# Altium PCB POT 10x8.PcbDoc (part 4 of 4)
Units mm, origin at the board's own origin, x right, y up, seen from the top; angles counter-clockwise.
Board outline 152.4 x 101.6 mm, 4 copper layers (Top Layer, Mid Layer 1, Mid Layer 2, Bottom Layer), stack 0.97 mm thick; 324 components, 355 nets, 1533 pads, 300 vias.
Unrouted connection lines stored in the file: 224.
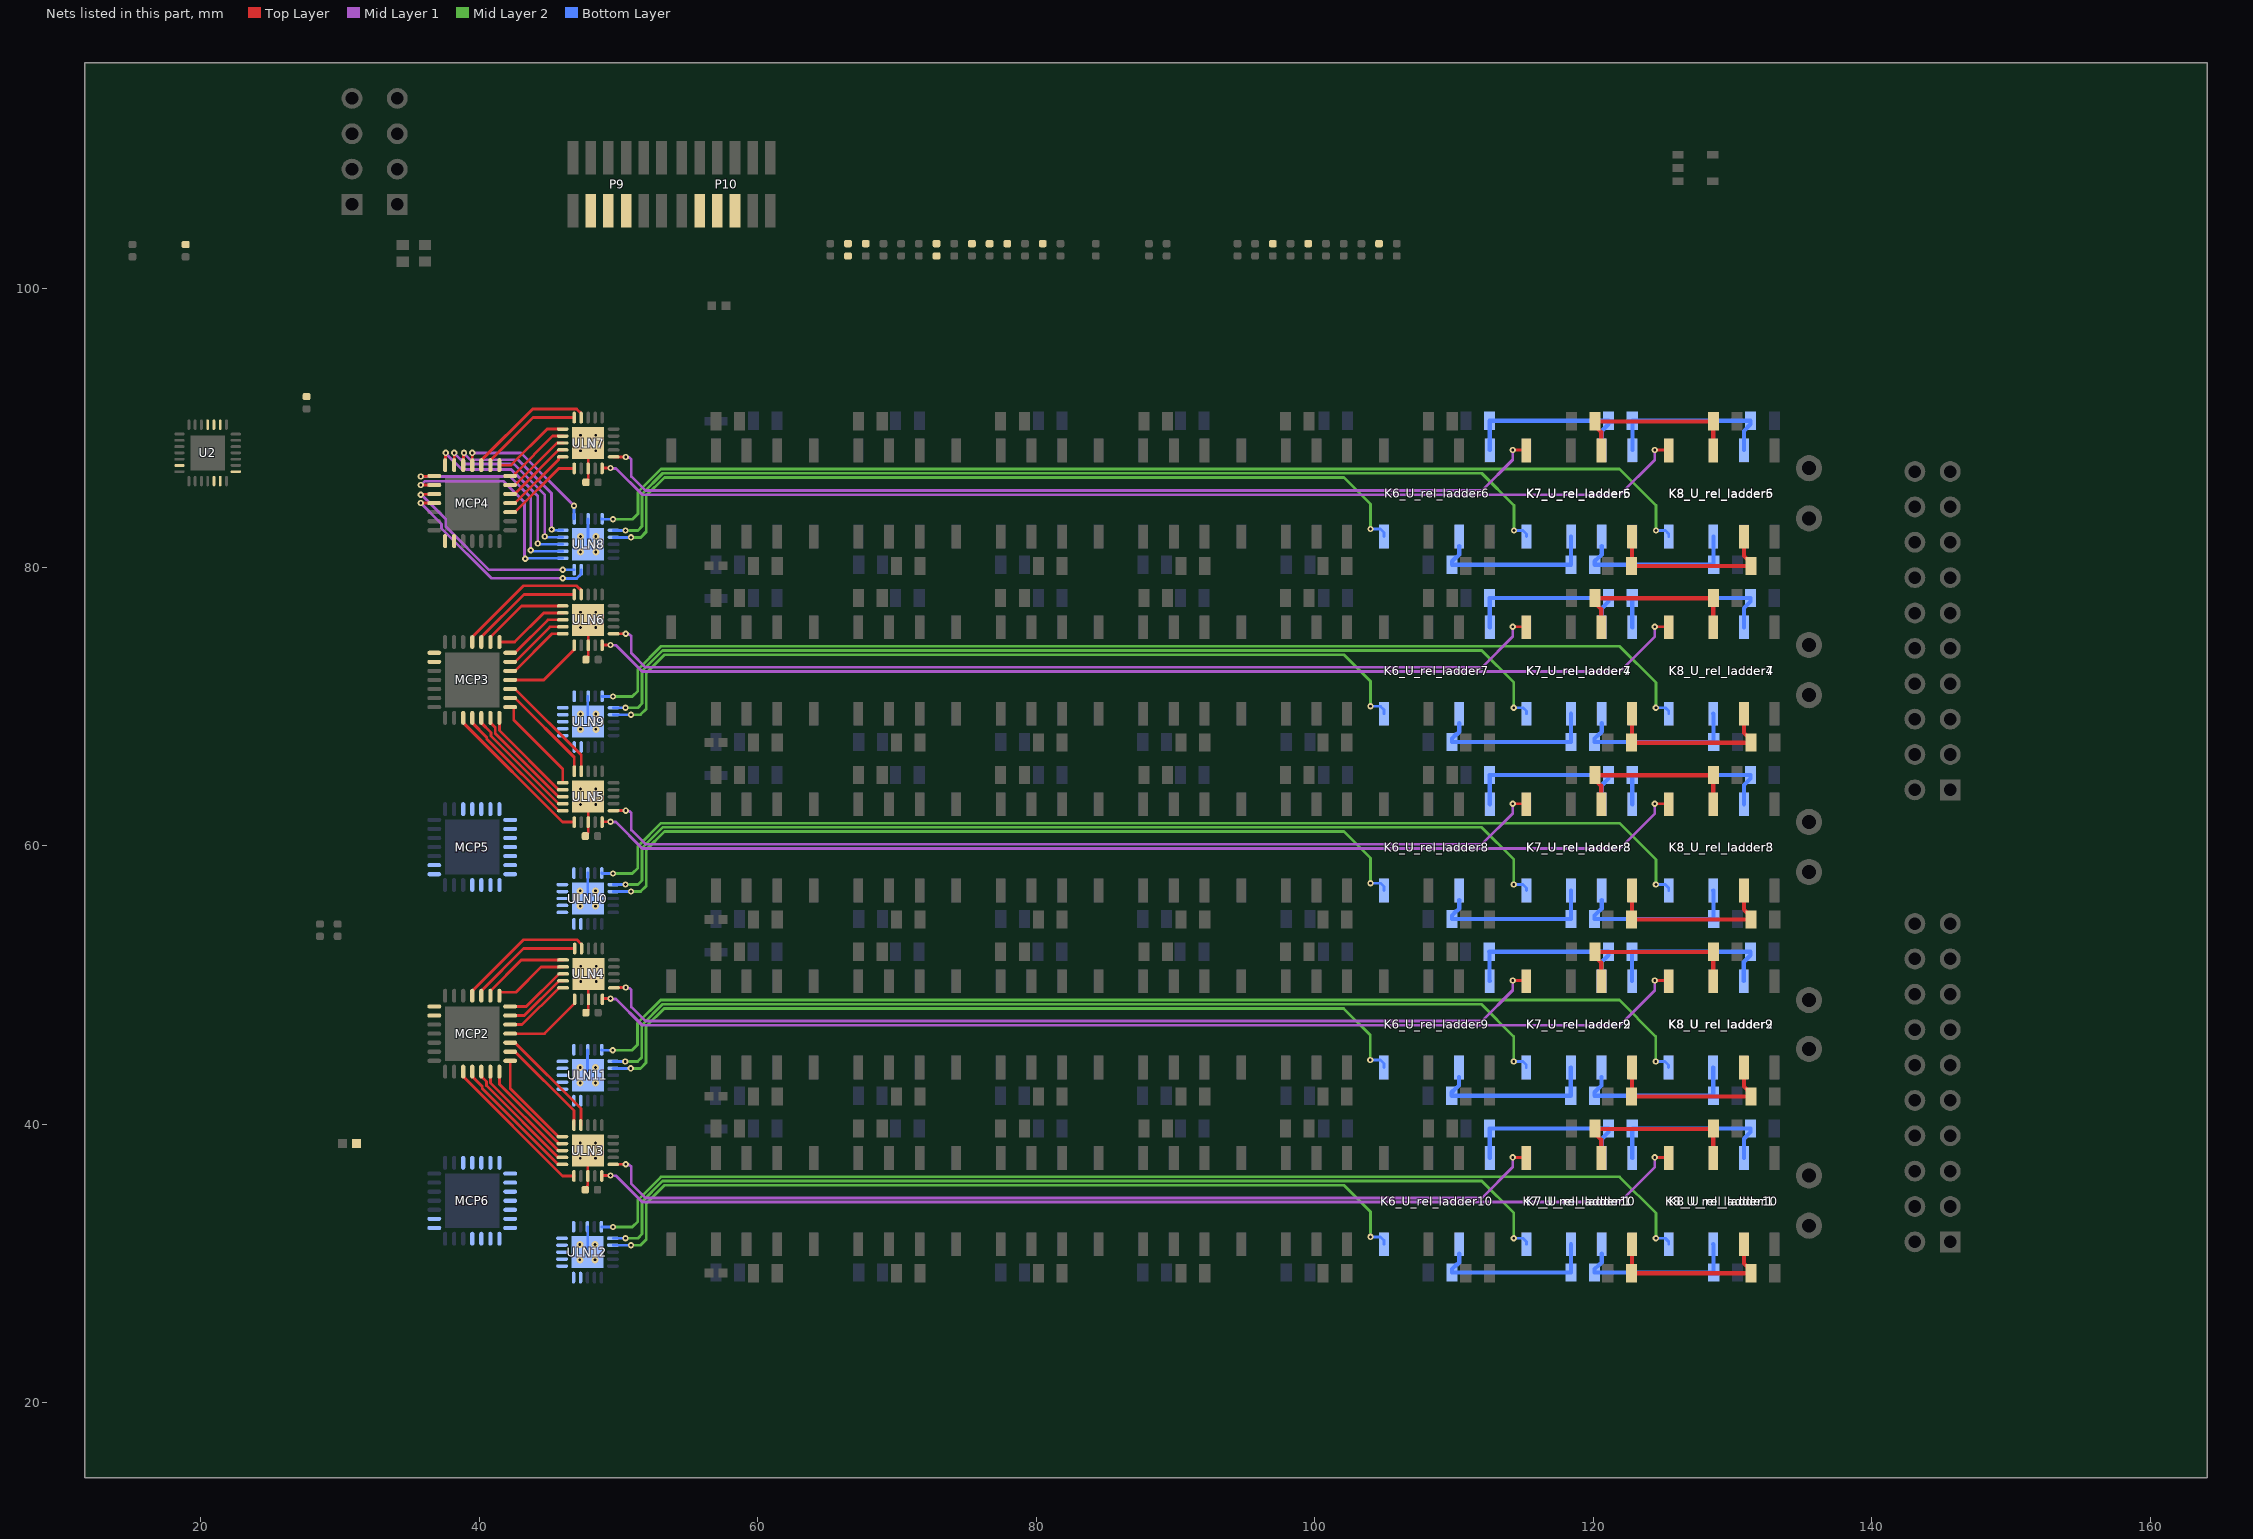
[diagram p6: the nets of this part, all layers, seen from the top]

## Via types
v1: diameter 0.45, hole 0.2, Top Layer to Bottom Layer, 186 vias
v2: diameter 0.5, hole 0.2, Top Layer to Bottom Layer, 85 vias
v3: diameter 0.6, hole 0.3, Top Layer to Bottom Layer, 25 vias
v4: diameter 0.66, hole 0.33, Top Layer to Bottom Layer, 4 vias

## Nets (pads, with @x,y where several pads share a name; then routed paths per layer and width w, separated by ;. In a path a pad name is that pad's centre, name@x,y a point inside that pad or via, vN(x,y) a via of type N, cw(c..) or ccw(c..) an arc to the next point about the centre after c; other vN are vias at no path point) (continued)
NetK6_U_rel_ladder6_4: K6_U_rel_ladder6.4 K7_U_rel_ladder6.3 R4_U_rel_ladder6.2 R6_U_rel_ladder6.1 | length 13
  Bottom Layer w0.3: K6_U_rel_ladder6.4@112.584,88.4 112.57,88.414 112.57,90.493 R6_U_rel_ladder6.1@112.556,90.507 R4_U_rel_ladder6.2@121.106,90.507 121.106,90.257 120.614,89.765 K7_U_rel_ladder6.3@120.614,88.4
NetK6_U_rel_ladder6_6: K6_U_rel_ladder6.6 K7_U_rel_ladder6.7 R3_U_rel_ladder6.2 R5_U_rel_ladder6.1 | length 12.2
  Bottom Layer w0.3: K6_U_rel_ladder6.6@110.384,81.521 110.384,80.9 110.208,80.724 110.164,80.724 109.856,80.416 R5_U_rel_ladder6.1@109.856,80.166 R3_U_rel_ladder6.2@118.406,80.166 118.41,80.17 118.41,82.196 K7_U_rel_ladder6.7@118.414,82.2
NetK6_U_rel_ladder6_8: K6_U_rel_ladder6.8 ULN8.12 | length 61.6
  Mid Layer 2 w0.2: v1(50.904,82.132) 51.598,82.132 51.998,82.532 51.998,85.132 53.304,86.438 102.098,86.438 104.004,84.532 v1(104.004,82.732)
  Bottom Layer w0.2: ULN8.12@49.629,82.132 v1(50.904,82.132) ; v1(104.004,82.732) 104.734,82.732 104.984,82.482 K6_U_rel_ladder6.8@104.984,82.2
NetK6_U_rel_ladder7_4: K6_U_rel_ladder7.4 K7_U_rel_ladder7.3 R4_U_rel_ladder7.2 R6_U_rel_ladder7.1 | length 13
  Bottom Layer w0.3: K6_U_rel_ladder7.4@112.58,75.668 112.566,75.682 112.566,77.761 R6_U_rel_ladder7.1@112.552,77.775 R4_U_rel_ladder7.2@121.102,77.775 121.102,77.525 120.61,77.033 K7_U_rel_ladder7.3@120.61,75.668
NetK6_U_rel_ladder7_6: K6_U_rel_ladder7.6 K7_U_rel_ladder7.7 R3_U_rel_ladder7.2 R5_U_rel_ladder7.1 | length 12.2
  Bottom Layer w0.3: K6_U_rel_ladder7.6@110.38,68.789 110.38,68.168 110.204,67.992 110.16,67.992 109.852,67.684 R5_U_rel_ladder7.1@109.852,67.434 R3_U_rel_ladder7.2@118.402,67.434 118.406,67.438 118.406,69.464 K7_U_rel_ladder7.7@118.41,69.468
NetK6_U_rel_ladder7_8: K6_U_rel_ladder7.8 ULN9.12 | length 61.6
  Mid Layer 2 w0.2: v1(50.9,69.4) 51.594,69.4 51.994,69.8 51.994,72.4 53.3,73.706 102.094,73.706 104,71.8 v1(104,70)
  Bottom Layer w0.2: ULN9.12@49.625,69.4 v1(50.9,69.4) ; v1(104,70) 104.73,70 104.98,69.75 K6_U_rel_ladder7.8@104.98,69.468
NetK6_U_rel_ladder8_4: K6_U_rel_ladder8.4 K7_U_rel_ladder8.3 R4_U_rel_ladder8.2 R6_U_rel_ladder8.1 | length 13
  Bottom Layer w0.3: K6_U_rel_ladder8.4@112.58,62.968 112.566,62.982 112.566,65.061 R6_U_rel_ladder8.1@112.552,65.075 R4_U_rel_ladder8.2@121.102,65.075 121.102,64.825 120.61,64.333 K7_U_rel_ladder8.3@120.61,62.968
NetK6_U_rel_ladder8_6: K6_U_rel_ladder8.6 K7_U_rel_ladder8.7 R3_U_rel_ladder8.2 R5_U_rel_ladder8.1 | length 12.2
  Bottom Layer w0.3: K6_U_rel_ladder8.6@110.38,56.089 110.38,55.468 110.204,55.292 110.16,55.292 109.852,54.984 R5_U_rel_ladder8.1@109.852,54.734 R3_U_rel_ladder8.2@118.402,54.734 118.406,54.738 118.406,56.764 K7_U_rel_ladder8.7@118.41,56.768
NetK6_U_rel_ladder8_8: K6_U_rel_ladder8.8 ULN10.12 | length 61.6
  Mid Layer 2 w0.2: v1(50.9,56.7) 51.594,56.7 51.994,57.1 51.994,59.7 53.3,61.006 102.094,61.006 104,59.1 v1(104,57.3)
  Bottom Layer w0.2: ULN10.12@49.625,56.7 v1(50.9,56.7) ; v1(104,57.3) 104.73,57.3 104.98,57.05 K6_U_rel_ladder8.8@104.98,56.768
NetK6_U_rel_ladder9_4: K6_U_rel_ladder9.4 K7_U_rel_ladder9.3 R4_U_rel_ladder9.2 R6_U_rel_ladder9.1 | length 13
  Bottom Layer w0.3: K6_U_rel_ladder9.4@112.566,50.268 112.552,50.282 112.552,52.361 R6_U_rel_ladder9.1@112.538,52.375 R4_U_rel_ladder9.2@121.088,52.375 121.088,52.125 120.596,51.633 K7_U_rel_ladder9.3@120.596,50.268
NetK6_U_rel_ladder9_6: K6_U_rel_ladder9.6 K7_U_rel_ladder9.7 R3_U_rel_ladder9.2 R5_U_rel_ladder9.1 | length 12.2
  Bottom Layer w0.3: K6_U_rel_ladder9.6@110.366,43.389 110.366,42.768 110.19,42.592 110.146,42.592 109.838,42.284 R5_U_rel_ladder9.1@109.838,42.034 R3_U_rel_ladder9.2@118.388,42.034 118.392,42.038 118.392,44.064 K7_U_rel_ladder9.7@118.396,44.068
NetK6_U_rel_ladder9_8: K6_U_rel_ladder9.8 ULN11.12 | length 61.6
  Mid Layer 2 w0.2: v1(50.886,44) 51.579,44 51.979,44.4 51.979,47 53.286,48.306 102.079,48.306 103.986,46.4 v1(103.986,44.6)
  Bottom Layer w0.2: ULN11.12@49.611,44 v1(50.886,44) ; v1(103.986,44.6) 104.716,44.6 104.966,44.35 K6_U_rel_ladder9.8@104.966,44.068
NetK6_U_rel_ladder10_4: K6_U_rel_ladder10.4 K7_U_rel_ladder10.3 R4_U_rel_ladder10.2 R6_U_rel_ladder10.1 | length 13
  Bottom Layer w0.3: K6_U_rel_ladder10.4@112.58,37.568 112.566,37.582 112.566,39.661 R6_U_rel_ladder10.1@112.552,39.675 R4_U_rel_ladder10.2@121.102,39.675 121.102,39.425 120.61,38.933 K7_U_rel_ladder10.3@120.61,37.568
NetK6_U_rel_ladder10_6: K6_U_rel_ladder10.6 K7_U_rel_ladder10.7 R3_U_rel_ladder10.2 R5_U_rel_ladder10.1 | length 12.2
  Bottom Layer w0.3: K6_U_rel_ladder10.6@110.38,30.689 110.38,30.068 110.204,29.892 110.16,29.892 109.852,29.584 R5_U_rel_ladder10.1@109.852,29.334 R3_U_rel_ladder10.2@118.402,29.334 118.406,29.338 118.406,31.364 K7_U_rel_ladder10.7@118.41,31.368
NetK6_U_rel_ladder10_8: K6_U_rel_ladder10.8 ULN12.12 | length 61.6
  Mid Layer 2 w0.2: v1(50.9,31.3) 51.594,31.3 51.994,31.7 51.994,34.3 53.3,35.606 102.094,35.606 104,33.7 v1(104,31.9)
  Bottom Layer w0.2: ULN12.12@49.625,31.3 v1(50.9,31.3) ; v1(104,31.9) 104.73,31.9 104.98,31.65 K6_U_rel_ladder10.8@104.98,31.368
NetK7_U_rel_ladder1_4: K7_U_rel_ladder1.4 K8_U_rel_ladder1.3 R2_U_rel_ladder1.2 R4_U_rel_ladder1.1 | length 12.9
  Top Layer w0.3: K7_U_rel_ladder1.4@122.791,31.368 122.786,31.363 122.786,29.293 122.781,29.288 131.28,29.288 131.28,29.538 130.824,29.994 K8_U_rel_ladder1.3@130.824,31.368
NetK7_U_rel_ladder1_6: K7_U_rel_ladder1.6 K8_U_rel_ladder1.7 R1_U_rel_ladder1.2 R3_U_rel_ladder1.1 | length 13
  Top Layer w0.3: K7_U_rel_ladder1.6@120.571,37.548 120.571,38.891 120.057,39.405 120.057,39.655 128.644,39.655 128.624,39.635 K8_U_rel_ladder1.7@128.624,37.568 K8_U_rel_ladder1.7@128.604,37.548
NetK7_U_rel_ladder1_8: K7_U_rel_ladder1.8 ULN3.11 | length 68.9
  Top Layer w0.2: ULN3.11@49.65,37.109 v1(50.525,37.109) ; v1(114.225,37.609) 115.184,37.609 K7_U_rel_ladder1.8@115.216,37.577
  Mid Layer 1 w0.2: v1(50.525,37.109) 50.573,37.061 50.796,37.061 50.925,36.932 50.925,35.709 51.933,34.701 112.017,34.701 114.225,36.909 v1(114.225,37.609)
NetK7_U_rel_ladder2_4: K7_U_rel_ladder2.4 K8_U_rel_ladder2.3 R2_U_rel_ladder2.2 R4_U_rel_ladder2.1 | length 12.9
  Top Layer w0.3: K7_U_rel_ladder2.4@122.791,44.068 122.786,44.063 122.786,41.993 122.781,41.988 131.28,41.988 131.28,42.238 130.824,42.694 K8_U_rel_ladder2.3@130.824,44.068
NetK7_U_rel_ladder2_6: K7_U_rel_ladder2.6 K8_U_rel_ladder2.7 R1_U_rel_ladder2.2 R3_U_rel_ladder2.1 | length 13
  Top Layer w0.3: K7_U_rel_ladder2.6@120.571,50.248 120.571,51.591 120.057,52.105 120.057,52.355 128.644,52.355 128.624,52.335 K8_U_rel_ladder2.7@128.624,50.268 K8_U_rel_ladder2.7@128.604,50.248
NetK7_U_rel_ladder2_8: K7_U_rel_ladder2.8 ULN4.11 | length 68.9
  Top Layer w0.2: ULN4.11@49.65,49.809 v1(50.525,49.809) ; v1(114.225,50.309) 115.184,50.309 K7_U_rel_ladder2.8@115.216,50.277
  Mid Layer 1 w0.2: v1(50.525,49.809) 50.573,49.761 50.796,49.761 50.925,49.632 50.925,48.409 51.933,47.401 112.017,47.401 114.225,49.609 v1(114.225,50.309)
NetK7_U_rel_ladder3_4: K7_U_rel_ladder3.4 K8_U_rel_ladder3.3 R2_U_rel_ladder3.2 R4_U_rel_ladder3.1 | length 12.9
  Top Layer w0.3: K7_U_rel_ladder3.4@122.791,56.768 122.786,56.763 122.786,54.693 122.781,54.688 131.28,54.688 131.28,54.938 130.824,55.394 K8_U_rel_ladder3.3@130.824,56.768
NetK7_U_rel_ladder3_6: K7_U_rel_ladder3.6 K8_U_rel_ladder3.7 R1_U_rel_ladder3.2 R3_U_rel_ladder3.1 | length 13
  Top Layer w0.3: K7_U_rel_ladder3.6@120.571,62.948 120.571,64.291 120.057,64.805 120.057,65.055 128.644,65.055 128.624,65.035 K8_U_rel_ladder3.7@128.624,62.968 K8_U_rel_ladder3.7@128.604,62.948
NetK7_U_rel_ladder3_8: K7_U_rel_ladder3.8 ULN5.11 | length 68.9
  Top Layer w0.2: ULN5.11@49.65,62.509 v1(50.525,62.509) ; v1(114.225,63.009) 115.184,63.009 K7_U_rel_ladder3.8@115.216,62.977
  Mid Layer 1 w0.2: v1(50.525,62.509) 50.573,62.461 50.796,62.461 50.925,62.332 50.925,61.109 51.933,60.101 112.017,60.101 114.225,62.309 v1(114.225,63.009)
NetK7_U_rel_ladder4_4: K7_U_rel_ladder4.4 K8_U_rel_ladder4.3 R2_U_rel_ladder4.2 R4_U_rel_ladder4.1 | length 12.9
  Top Layer w0.3: K7_U_rel_ladder4.4@122.791,69.468 122.786,69.463 122.786,67.393 122.781,67.388 131.28,67.388 131.28,67.638 130.824,68.094 K8_U_rel_ladder4.3@130.824,69.468
NetK7_U_rel_ladder4_6: K7_U_rel_ladder4.6 K8_U_rel_ladder4.7 R1_U_rel_ladder4.2 R3_U_rel_ladder4.1 | length 13
  Top Layer w0.3: K7_U_rel_ladder4.6@120.571,75.648 120.571,76.991 120.057,77.505 120.057,77.755 128.644,77.755 128.624,77.735 K8_U_rel_ladder4.7@128.624,75.668 K8_U_rel_ladder4.7@128.604,75.648
NetK7_U_rel_ladder4_8: K7_U_rel_ladder4.8 ULN6.11 | length 68.9
  Top Layer w0.2: ULN6.11@49.65,75.209 v1(50.525,75.209) ; v1(114.225,75.709) 115.184,75.709 K7_U_rel_ladder4.8@115.216,75.677
  Mid Layer 1 w0.2: v1(50.525,75.209) 50.573,75.161 50.796,75.161 50.925,75.032 50.925,73.809 51.933,72.801 112.017,72.801 114.225,75.009 v1(114.225,75.709)
NetK7_U_rel_ladder5_4: K7_U_rel_ladder5.4 K8_U_rel_ladder5.3 R2_U_rel_ladder5.2 R4_U_rel_ladder5.1 | length 12.9
  Top Layer w0.3: K7_U_rel_ladder5.4@122.791,82.168 122.786,82.163 122.786,80.093 122.781,80.088 131.28,80.088 131.28,80.338 130.824,80.794 K8_U_rel_ladder5.3@130.824,82.168
NetK7_U_rel_ladder5_6: K7_U_rel_ladder5.6 K8_U_rel_ladder5.7 R1_U_rel_ladder5.2 R3_U_rel_ladder5.1 | length 13
  Top Layer w0.3: K7_U_rel_ladder5.6@120.571,88.348 120.571,89.691 120.057,90.205 120.057,90.455 128.644,90.455 128.624,90.435 K8_U_rel_ladder5.7@128.624,88.368 K8_U_rel_ladder5.7@128.604,88.348
NetK7_U_rel_ladder5_8: K7_U_rel_ladder5.8 ULN7.11 | length 68.9
  Top Layer w0.2: ULN7.11@49.65,87.909 v1(50.525,87.909) ; v1(114.225,88.409) 115.184,88.409 K7_U_rel_ladder5.8@115.216,88.377
  Mid Layer 1 w0.2: v1(50.525,87.909) 50.573,87.861 50.796,87.861 50.925,87.732 50.925,86.509 51.933,85.501 112.017,85.501 114.225,87.709 v1(114.225,88.409)
NetK7_U_rel_ladder6_4: K7_U_rel_ladder6.4 K8_U_rel_ladder6.3 R2_U_rel_ladder6.2 R4_U_rel_ladder6.1 | length 12.9
  Bottom Layer w0.3: K7_U_rel_ladder6.4@122.814,88.4 122.81,88.404 122.81,90.503 R4_U_rel_ladder6.1@122.806,90.507 R2_U_rel_ladder6.2@131.306,90.507 131.306,90.257 130.828,89.779 K8_U_rel_ladder6.3@130.828,88.4
NetK7_U_rel_ladder6_6: K7_U_rel_ladder6.6 K8_U_rel_ladder6.7 R1_U_rel_ladder6.2 R3_U_rel_ladder6.1 | length 12.2
  Bottom Layer w0.3: K7_U_rel_ladder6.6@120.614,81.521 120.614,80.9 120.439,80.724 120.414,80.724 120.106,80.416 R3_U_rel_ladder6.1@120.106,80.166 128.642,80.166 R1_U_rel_ladder6.2@128.642,80.18 ; K8_U_rel_ladder6.7@128.628,82.2 128.642,82.186 R1_U_rel_ladder6.2@128.642,80.18 ; R1_U_rel_ladder6.2@128.656,80.166 R1_U_rel_ladder6.2@128.642,80.18
NetK7_U_rel_ladder6_8: K7_U_rel_ladder6.8 ULN8.11 | length 71.7
  Mid Layer 2 w0.2: v1(50.504,82.632) 51.396,82.632 51.696,82.932 51.696,85.257 53.179,86.74 111.996,86.74 114.304,84.432 v1(114.304,82.632)
  Bottom Layer w0.2: ULN8.11@49.629,82.632 v1(50.504,82.632) ; v1(114.304,82.632) 114.964,82.632 115.214,82.382 K7_U_rel_ladder6.8@115.214,82.2
NetK7_U_rel_ladder7_4: K7_U_rel_ladder7.4 K8_U_rel_ladder7.3 R2_U_rel_ladder7.2 R4_U_rel_ladder7.1 | length 12.9
  Bottom Layer w0.3: K7_U_rel_ladder7.4@122.81,75.668 122.806,75.672 122.806,77.771 R4_U_rel_ladder7.1@122.802,77.775 R2_U_rel_ladder7.2@131.302,77.775 131.302,77.525 130.824,77.047 K8_U_rel_ladder7.3@130.824,75.668
NetK7_U_rel_ladder7_6: K7_U_rel_ladder7.6 K8_U_rel_ladder7.7 R1_U_rel_ladder7.2 R3_U_rel_ladder7.1 | length 12.2
  Bottom Layer w0.3: K7_U_rel_ladder7.6@120.61,68.789 120.61,68.168 120.435,67.992 120.41,67.992 120.102,67.684 R3_U_rel_ladder7.1@120.102,67.434 128.638,67.434 R1_U_rel_ladder7.2@128.638,67.448 ; K8_U_rel_ladder7.7@128.624,69.468 128.638,69.454 R1_U_rel_ladder7.2@128.638,67.448 ; R1_U_rel_ladder7.2@128.652,67.434 R1_U_rel_ladder7.2@128.638,67.448
NetK7_U_rel_ladder7_8: K7_U_rel_ladder7.8 ULN9.11 | length 71.7
  Mid Layer 2 w0.2: v1(50.5,69.9) 51.392,69.9 51.692,70.2 51.692,72.525 53.175,74.008 111.992,74.008 114.3,71.7 v1(114.3,69.9)
  Bottom Layer w0.2: ULN9.11@49.625,69.9 v1(50.5,69.9) ; v1(114.3,69.9) 114.96,69.9 115.21,69.65 K7_U_rel_ladder7.8@115.21,69.468
NetK7_U_rel_ladder8_4: K7_U_rel_ladder8.4 K8_U_rel_ladder8.3 R2_U_rel_ladder8.2 R4_U_rel_ladder8.1 | length 12.9
  Bottom Layer w0.3: K7_U_rel_ladder8.4@122.81,62.968 122.806,62.972 122.806,65.071 R4_U_rel_ladder8.1@122.802,65.075 R2_U_rel_ladder8.2@131.302,65.075 131.302,64.825 130.824,64.347 K8_U_rel_ladder8.3@130.824,62.968
NetK7_U_rel_ladder8_6: K7_U_rel_ladder8.6 K8_U_rel_ladder8.7 R1_U_rel_ladder8.2 R3_U_rel_ladder8.1 | length 12.2
  Bottom Layer w0.3: K7_U_rel_ladder8.6@120.61,56.089 120.61,55.468 120.435,55.292 120.41,55.292 120.102,54.984 R3_U_rel_ladder8.1@120.102,54.734 128.638,54.734 R1_U_rel_ladder8.2@128.638,54.748 ; K8_U_rel_ladder8.7@128.624,56.768 128.638,56.754 R1_U_rel_ladder8.2@128.638,54.748 ; R1_U_rel_ladder8.2@128.652,54.734 R1_U_rel_ladder8.2@128.638,54.748
NetK7_U_rel_ladder8_8: K7_U_rel_ladder8.8 ULN10.11 | length 71.7
  Mid Layer 2 w0.2: v1(50.5,57.2) 51.392,57.2 51.692,57.5 51.692,59.825 53.175,61.308 111.992,61.308 114.3,59 v1(114.3,57.2)
  Bottom Layer w0.2: ULN10.11@49.625,57.2 v1(50.5,57.2) ; v1(114.3,57.2) 114.96,57.2 115.21,56.95 K7_U_rel_ladder8.8@115.21,56.768
NetK7_U_rel_ladder9_4: K7_U_rel_ladder9.4 K8_U_rel_ladder9.3 R2_U_rel_ladder9.2 R4_U_rel_ladder9.1 | length 12.9
  Bottom Layer w0.3: K7_U_rel_ladder9.4@122.796,50.268 122.792,50.272 122.792,52.371 R4_U_rel_ladder9.1@122.788,52.375 R2_U_rel_ladder9.2@131.288,52.375 131.288,52.125 130.81,51.647 K8_U_rel_ladder9.3@130.81,50.268
NetK7_U_rel_ladder9_6: K7_U_rel_ladder9.6 K8_U_rel_ladder9.7 R1_U_rel_ladder9.2 R3_U_rel_ladder9.1 | length 12.2
  Bottom Layer w0.3: K7_U_rel_ladder9.6@120.596,43.389 120.596,42.768 120.42,42.592 120.396,42.592 120.088,42.284 R3_U_rel_ladder9.1@120.088,42.034 128.624,42.034 R1_U_rel_ladder9.2@128.624,42.048 ; K8_U_rel_ladder9.7@128.61,44.068 128.624,44.054 R1_U_rel_ladder9.2@128.624,42.048 ; R1_U_rel_ladder9.2@128.638,42.034 R1_U_rel_ladder9.2@128.624,42.048
NetK7_U_rel_ladder9_8: K7_U_rel_ladder9.8 ULN11.11 | length 71.7
  Mid Layer 2 w0.2: v1(50.486,44.5) 51.378,44.5 51.678,44.8 51.678,47.125 53.161,48.608 111.978,48.608 114.286,46.3 v1(114.286,44.5)
  Bottom Layer w0.2: ULN11.11@49.611,44.5 v1(50.486,44.5) ; v1(114.286,44.5) 114.946,44.5 115.196,44.25 K7_U_rel_ladder9.8@115.196,44.068
NetK7_U_rel_ladder10_4: K7_U_rel_ladder10.4 K8_U_rel_ladder10.3 R2_U_rel_ladder10.2 R4_U_rel_ladder10.1 | length 12.9
  Bottom Layer w0.3: K7_U_rel_ladder10.4@122.81,37.568 122.806,37.572 122.806,39.671 R4_U_rel_ladder10.1@122.802,39.675 R2_U_rel_ladder10.2@131.302,39.675 131.302,39.425 130.824,38.947 K8_U_rel_ladder10.3@130.824,37.568
NetK7_U_rel_ladder10_6: K7_U_rel_ladder10.6 K8_U_rel_ladder10.7 R1_U_rel_ladder10.2 R3_U_rel_ladder10.1 | length 12.2
  Bottom Layer w0.3: K7_U_rel_ladder10.6@120.61,30.689 120.61,30.068 120.435,29.892 120.41,29.892 120.102,29.584 R3_U_rel_ladder10.1@120.102,29.334 128.638,29.334 R1_U_rel_ladder10.2@128.638,29.348 ; K8_U_rel_ladder10.7@128.624,31.368 128.638,31.354 R1_U_rel_ladder10.2@128.638,29.348 ; R1_U_rel_ladder10.2@128.652,29.334 R1_U_rel_ladder10.2@128.638,29.348
NetK7_U_rel_ladder10_8: K7_U_rel_ladder10.8 ULN12.11 | length 71.7
  Mid Layer 2 w0.2: v1(50.5,31.8) 51.392,31.8 51.692,32.1 51.692,34.425 53.175,35.908 111.992,35.908 114.3,33.6 v1(114.3,31.8)
  Bottom Layer w0.2: ULN12.11@49.625,31.8 v1(50.5,31.8) ; v1(114.3,31.8) 114.96,31.8 115.21,31.55 K7_U_rel_ladder10.8@115.21,31.368
NetK8_U_rel_ladder1_8: K8_U_rel_ladder1.8 ULN3.10 | length 79.2
  Top Layer w0.2: ULN3.10@48.825,36.284 48.825,36.286 48.848,36.309 v1(49.425,36.309) ; v1(124.425,37.609) 125.417,37.609 K8_U_rel_ladder1.8@125.449,37.577
  Mid Layer 1 w0.2: v1(49.425,36.309) 49.446,36.288 49.824,36.288 51.712,34.399 121.915,34.399 124.425,36.909 v1(124.425,37.609)
NetK8_U_rel_ladder2_8: K8_U_rel_ladder2.8 ULN4.10 | length 79.2
  Top Layer w0.2: ULN4.10@48.825,48.984 48.825,48.986 48.848,49.009 v1(49.425,49.009) ; v1(124.425,50.309) 125.417,50.309 K8_U_rel_ladder2.8@125.449,50.277
  Mid Layer 1 w0.2: v1(49.425,49.009) 49.446,48.988 49.824,48.988 51.712,47.099 121.915,47.099 124.425,49.609 v1(124.425,50.309)
NetK8_U_rel_ladder3_8: K8_U_rel_ladder3.8 ULN5.10 | length 79.2
  Top Layer w0.2: ULN5.10@48.825,61.684 48.825,61.686 48.848,61.709 v1(49.425,61.709) ; v1(124.425,63.009) 125.417,63.009 K8_U_rel_ladder3.8@125.449,62.977
  Mid Layer 1 w0.2: v1(49.425,61.709) 49.446,61.688 49.824,61.688 51.712,59.799 121.915,59.799 124.425,62.309 v1(124.425,63.009)
NetK8_U_rel_ladder4_8: K8_U_rel_ladder4.8 ULN6.10 | length 79.2
  Top Layer w0.2: ULN6.10@48.825,74.384 48.825,74.386 48.848,74.409 v1(49.425,74.409) ; v1(124.425,75.709) 125.417,75.709 K8_U_rel_ladder4.8@125.449,75.677
  Mid Layer 1 w0.2: v1(49.425,74.409) 49.446,74.388 49.824,74.388 51.712,72.499 121.915,72.499 124.425,75.009 v1(124.425,75.709)
NetK8_U_rel_ladder5_8: K8_U_rel_ladder5.8 ULN7.10 | length 79.2
  Top Layer w0.2: ULN7.10@48.825,87.084 48.825,87.086 48.848,87.109 v1(49.425,87.109) ; v1(124.425,88.409) 125.417,88.409 K8_U_rel_ladder5.8@125.449,88.377
  Mid Layer 1 w0.2: v1(49.425,87.109) 49.446,87.088 49.824,87.088 51.712,85.199 121.915,85.199 124.425,87.709 v1(124.425,88.409)
NetK8_U_rel_ladder6_8: K8_U_rel_ladder6.8 ULN8.10 | length 82.2
  Mid Layer 2 w0.2: v1(49.604,83.432) 50.994,83.432 51.394,83.832 51.394,85.382 53.054,87.042 111.704,87.042 121.894,87.042 124.504,84.432 v1(124.504,82.632)
  Bottom Layer w0.2: ULN8.10@48.804,83.457 48.804,83.455 48.827,83.432 v1(49.604,83.432) ; v1(124.504,82.632) 125.178,82.632 125.428,82.382 K8_U_rel_ladder6.8@125.428,82.2
NetK8_U_rel_ladder7_8: K8_U_rel_ladder7.8 ULN9.10 | length 82.2
  Mid Layer 2 w0.2: v1(49.6,70.7) 50.99,70.7 51.39,71.1 51.39,72.65 53.05,74.31 111.7,74.31 121.89,74.31 124.5,71.7 v1(124.5,69.9)
  Bottom Layer w0.2: ULN9.10@48.8,70.725 48.8,70.723 48.823,70.7 v1(49.6,70.7) ; v1(124.5,69.9) 125.174,69.9 125.424,69.65 K8_U_rel_ladder7.8@125.424,69.468
NetK8_U_rel_ladder8_8: K8_U_rel_ladder8.8 ULN10.10 | length 82.2
  Mid Layer 2 w0.2: v1(49.6,58) 50.99,58 51.39,58.4 51.39,59.95 53.05,61.61 111.7,61.61 121.89,61.61 124.5,59 v1(124.5,57.2)
  Bottom Layer w0.2: ULN10.10@48.8,58.023 ULN10.10@48.8,58.023 48.823,58 v1(49.6,58) ; v1(124.5,57.2) 125.174,57.2 125.424,56.95 K8_U_rel_ladder8.8@125.424,56.768
NetK8_U_rel_ladder9_8: K8_U_rel_ladder9.8 ULN11.10 | length 82.2
  Mid Layer 2 w0.2: v1(49.586,45.3) 50.976,45.3 51.376,45.7 51.376,47.25 53.036,48.91 111.686,48.91 121.876,48.91 124.486,46.3 v1(124.486,44.5)
  Bottom Layer w0.2: ULN11.10@48.786,45.325 48.786,45.323 48.809,45.3 v1(49.586,45.3) ; v1(124.486,44.5) 125.16,44.5 125.41,44.25 K8_U_rel_ladder9.8@125.41,44.068
NetK8_U_rel_ladder10_8: K8_U_rel_ladder10.8 ULN12.10 | length 82.2
  Mid Layer 2 w0.2: v1(49.6,32.6) 50.99,32.6 51.39,33 51.39,34.55 53.05,36.21 111.7,36.21 121.89,36.21 124.5,33.6 v1(124.5,31.8)
  Bottom Layer w0.2: ULN12.10@48.8,32.625 48.8,32.623 48.823,32.6 v1(49.6,32.6) ; v1(124.5,31.8) 125.174,31.8 125.424,31.55 K8_U_rel_ladder10.8@125.424,31.368
NetMCP2_1: MCP2.1 ULN4.2 | length 5.5
  Top Layer w0.2: MCP2.1@41.45,49.218 41.45,49.422 41.496,49.468 42.631,49.468 44.447,51.284 ULN4.2@46.023,51.284
NetMCP2_2: MCP2.2 ULN4.1 | length 6.5
  Top Layer w0.2: MCP2.2@40.8,49.218 40.8,49.568 43.016,51.784 ULN4.1@46.023,51.784
NetMCP2_3: MCP2.3 ULN4.20 | length 8.3
  Top Layer w0.2: MCP2.3@40.15,49.218 40.15,49.568 43.191,52.609 ULN4.20@46.848,52.609
NetMCP2_4: MCP2.4 ULN4.19 | length 10.2
  Top Layer w0.2: MCP2.4@39.5,49.218 39.5,49.568 43.168,53.236 47.022,53.236 47.348,52.909 ULN4.19@47.348,52.609
NetMCP2_17: MCP2.17 ULN3.6 | length 11.3
  Top Layer w0.2: MCP2.17@38.85,43.768 38.85,43.418 45.993,36.275 ULN3.6@46.8,36.275
NetMCP2_18: MCP2.18 ULN3.5 | length 9.5
  Top Layer w0.2: MCP2.18@39.5,43.768 39.5,43.418 40.216,42.702 40.216,42.559 45.675,37.1 ULN3.5@45.975,37.1
NetMCP2_19: MCP2.19 ULN3.4 | length 8.8
  Top Layer w0.2: MCP2.19@40.15,43.768 40.15,43.418 40.518,43.05 40.518,42.757 45.675,37.6 ULN3.4@45.975,37.6
NetMCP2_20: MCP2.20 ULN3.3 | length 8
  Top Layer w0.2: MCP2.20@40.8,43.768 40.819,43.749 40.819,42.956 45.675,38.1 ULN3.3@45.975,38.1
NetMCP2_21: MCP2.21 ULN3.2 | length 7.3
  Top Layer w0.2: MCP2.21@41.45,43.768 41.45,42.863 45.761,38.552 45.761,38.577 45.784,38.6 ULN3.2@45.975,38.6
NetMCP2_22: MCP2.22 ULN3.1 | length 7.2
  Top Layer w0.2: MCP2.22@42.225,44.543 42.225,42.55 45.675,39.1 ULN3.1@45.975,39.1
NetMCP2_23: MCP2.23 ULN3.20 | length 7.4
  Top Layer w0.2: MCP2.23@42.225,45.193 42.575,45.193 46.8,40.968 ULN3.20@46.8,39.925
NetMCP2_24: MCP2.24 ULN3.19 | length 8.2
  Top Layer w0.2: MCP2.24@42.225,45.843 42.575,45.843 47.3,41.118 ULN3.19@47.3,39.925
NetMCP2_25: MCP2.25 ULN4.6 | length 5.8
  Top Layer w0.2: MCP2.25@42.225,46.493 44.682,46.493 46.848,48.659 ULN4.6@46.848,48.959
NetMCP2_26: MCP2.26 ULN4.5 | length 4.9
  Top Layer w0.2: MCP2.26@42.225,47.143 43.082,47.143 45.723,49.784 ULN4.5@46.023,49.784
NetMCP2_27: MCP2.27 ULN4.4 | length 4.8
  Top Layer w0.2: MCP2.27@42.225,47.793 43.232,47.793 45.723,50.284 ULN4.4@46.023,50.284
NetMCP2_28: MCP2.28 ULN4.3 | length 4.8
  Top Layer w0.2: MCP2.28@42.225,48.443 43.382,48.443 45.723,50.784 ULN4.3@46.023,50.784
NetMCP3_1: MCP3.1 ULN6.2 | length 5.4
  Top Layer w0.2: MCP3.1@41.45,74.618 42.546,74.618 44.637,76.709 ULN6.2@46,76.709
NetMCP3_2: MCP3.2 ULN6.1 | length 6.5
  Top Layer w0.2: MCP3.2@40.8,74.618 40.8,74.968 43.041,77.209 ULN6.1@46,77.209
NetMCP3_3: MCP3.3 ULN6.20 | length 8.3
  Top Layer w0.2: MCP3.3@40.15,74.618 40.15,74.968 43.216,78.034 ULN6.20@46.825,78.034
NetMCP3_4: MCP3.4 ULN6.19 | length 10.1
  Top Layer w0.2: MCP3.4@39.5,74.618 39.5,74.968 43.193,78.661 46.998,78.661 47.325,78.334 ULN6.19@47.325,78.034
NetMCP3_17: MCP3.17 ULN5.6 | length 11.3
  Top Layer w0.2: MCP3.17@38.85,69.168 38.85,68.818 45.984,61.684 ULN5.6@46.825,61.684
NetMCP3_18: MCP3.18 ULN5.5 | length 9.5
  Top Layer w0.2: MCP3.18@39.5,69.168 39.5,68.818 40.545,67.773 40.545,67.664 45.7,62.509 ULN5.5@46,62.509
NetMCP3_19: MCP3.19 ULN5.4 | length 8.8
  Top Layer w0.2: MCP3.19@40.15,69.168 40.15,68.818 40.847,68.121 40.847,67.862 45.7,63.009 ULN5.4@46,63.009
NetMCP3_20: MCP3.20 ULN5.3 | length 8
  Top Layer w0.2: MCP3.20@40.8,69.168 40.8,68.818 41.148,68.47 41.148,68.061 45.7,63.509 ULN5.3@46,63.509
NetMCP3_21: MCP3.21 ULN5.2 | length 7.2
  Top Layer w0.2: MCP3.21@41.45,69.168 41.45,68.259 45.7,64.009 ULN5.2@46,64.009
NetMCP3_22: MCP3.22 ULN5.1 | length 7.1
  Top Layer w0.2: MCP3.22@42.225,69.943 42.429,69.943 42.475,69.897 42.475,69.037 46,65.511 ULN5.1@46,64.509
NetMCP3_23: MCP3.23 ULN5.20 | length 7.4
  Top Layer w0.2: MCP3.23@42.225,70.593 42.575,70.593 46.825,66.343 ULN5.20@46.825,65.334
NetMCP3_24: MCP3.24 ULN5.19 | length 8.2
  Top Layer w0.2: MCP3.24@42.225,71.243 42.575,71.243 47.325,66.493 ULN5.19@47.325,65.334
NetMCP3_25: MCP3.25 ULN6.6 | length 5.8
  Top Layer w0.2: MCP3.25@42.225,71.893 44.634,71.893 46.825,74.084 ULN6.6@46.825,74.384
NetMCP3_26: MCP3.26 ULN6.5 | length 4.9
  Top Layer w0.2: MCP3.26@42.225,72.543 42.575,72.543 45.241,75.209 ULN6.5@46,75.209
NetMCP3_27: MCP3.27 ULN6.4 | length 4.8
  Top Layer w0.2: MCP3.27@42.225,73.193 42.575,73.193 45.091,75.709 ULN6.4@46,75.709
NetMCP3_28: MCP3.28 ULN6.3 | length 4.8
  Top Layer w0.2: MCP3.28@42.225,73.843 42.575,73.843 44.941,76.209 ULN6.3@46,76.209
NetMCP4_1: MCP4.1 ULN8.2 | length 15.6
  Top Layer w0.2: v1(35.8,86.5) 35.824,86.524 36.756,86.524 MCP4.1@36.775,86.543
  Mid Layer 1 w0.2: v1(35.8,86.5) 42.2,86.5 43.7,85 v1(43.7,81.2)
  Bottom Layer w0.2: v1(43.7,81.2) 43.768,81.2 43.83,81.138 ULN8.2@46,81.138
NetMCP4_2: MCP4.2 ULN8.1 | length 16
  Top Layer w0.2: v1(35.8,85.9) 35.803,85.897 36.771,85.897 MCP4.2@36.775,85.893
  Mid Layer 1 w0.2: v1(35.8,85.9) 35.842,85.9 36.112,86.17 41.73,86.17 43.248,84.652 43.248,81.013 43.252,81.009 43.252,80.648 v1(43.3,80.6)
  Bottom Layer w0.2: v1(43.3,80.6) 43.328,80.628 45.991,80.628 ULN8.1@46,80.638
NetMCP4_3: MCP4.3 ULN8.20 | length 14.6
  Top Layer w0.2: v1(35.8,85.2) 35.824,85.224 36.756,85.224 MCP4.3@36.775,85.243
  Mid Layer 1 w0.2: v1(35.8,85.2) 35.839,85.2 37.6,83.439 37.6,82.9 40.7,79.8 v1(46,79.8)
  Bottom Layer w0.2: v1(46,79.8) 46.812,79.8 ULN8.20@46.825,79.813
NetMCP4_4: MCP4.4 ULN8.19 | length 15.4
  Top Layer w0.2: v1(35.8,84.6) 35.803,84.597 36.771,84.597 MCP4.4@36.775,84.593
  Mid Layer 1 w0.2: v1(35.8,84.6) 37.298,83.102 37.298,82.775 40.873,79.2 v1(46,79.2)
  Bottom Layer w0.2: v1(46,79.2) 46.014,79.186 46.998,79.186 47.325,79.513 ULN8.19@47.325,79.813
NetMCP4_17: MCP4.17 ULN7.6 | length 5.9
  Top Layer w0.2: MCP4.17@42.225,83.943 42.575,83.943 45.716,87.084 ULN7.6@46.825,87.084
NetMCP4_18: MCP4.18 ULN7.5 | length 5.3
  Top Layer w0.2: MCP4.18@42.225,84.593 42.575,84.593 45.691,87.709 45.691,87.886 45.714,87.909 ULN7.5@46,87.909
NetMCP4_19: MCP4.19 ULN7.4 | length 5.1
  Top Layer w0.2: MCP4.19@42.225,85.243 42.548,85.243 42.594,85.289 42.594,85.303 45.7,88.409 ULN7.4@46,88.409
NetMCP4_20: MCP4.20 ULN7.3 | length 5
  Top Layer w0.2: MCP4.20@42.225,85.893 42.575,85.893 45.581,88.899 45.991,88.899 ULN7.3@46,88.909
NetMCP4_21: MCP4.21 ULN7.2 | length 5
  Top Layer w0.2: MCP4.21@42.225,86.543 42.548,86.543 42.594,86.589 42.594,86.728 45.275,89.409 ULN7.2@46,89.409
NetMCP4_22: MCP4.22 ULN7.1 | length 5.6
  Top Layer w0.2: MCP4.22@41.45,87.318 42.296,87.318 44.887,89.909 ULN7.1@46,89.909
NetMCP4_23: MCP4.23 ULN7.20 | length 7.6
  Top Layer w0.2: MCP4.23@40.8,87.318 40.8,87.668 43.866,90.734 ULN7.20@46.825,90.734
NetMCP4_24: MCP4.24 ULN7.19 | length 9.5
  Top Layer w0.2: MCP4.24@40.15,87.318 40.15,87.668 43.843,91.361 46.998,91.361 47.325,91.034 ULN7.19@47.325,90.734
NetMCP4_25: MCP4.25 ULN8.6 | length 10.7
  Top Layer w0.2: MCP4.25@39.5,87.318 v1(39.5,88.2)
  Mid Layer 1 w0.2: v1(39.5,88.2) 43,88.2 v1(46.8,84.4)
  Bottom Layer w0.2: v1(46.8,84.4) 46.816,84.384 46.816,83.473 ULN8.6@46.825,83.463
NetMCP4_26: MCP4.26 ULN8.5 | length 11.9
  Top Layer w0.2: MCP4.26@38.85,87.318 38.869,87.337 38.869,88.169 v1(38.9,88.2)
  Mid Layer 1 w0.2: v1(38.9,88.2) 38.9,88.161 39.361,87.7 42.8,87.7 45.2,85.3 v1(45.2,82.7)
  Bottom Layer w0.2: v1(45.2,82.7) 45.268,82.7 45.32,82.648 45.991,82.648 ULN8.5@46,82.638
NetMCP4_27: MCP4.27 ULN8.4 | length 12.9
  Top Layer w0.2: MCP4.27@38.2,87.318 v1(38.2,88.2)
  Mid Layer 1 w0.2: v1(38.2,88.2) 39.002,87.398 42.5,87.398 44.7,85.198 v1(44.7,82.2)
  Bottom Layer w0.2: v1(44.7,82.2) 44.768,82.2 44.83,82.138 ULN8.4@46,82.138
NetMCP4_28: MCP4.28 ULN8.3 | length 14
  Top Layer w0.2: MCP4.28@37.55,87.318 37.569,87.337 37.569,88.169 v1(37.6,88.2)
  Mid Layer 1 w0.2: v1(37.6,88.2) 37.6,88.161 38.761,87 42.3,87 44.2,85.1 v1(44.2,81.7)
  Bottom Layer w0.2: v1(44.2,81.7) 44.268,81.7 44.33,81.638 ULN8.3@46,81.638
NetMCP5_1: MCP5.1 ULN10.2
NetMCP5_2: MCP5.2 ULN10.1
NetMCP5_3: MCP5.3 ULN10.20
NetMCP5_4: MCP5.4 ULN10.19
NetMCP5_17: MCP5.17 ULN9.6
NetMCP5_18: MCP5.18 ULN9.5
NetMCP5_19: MCP5.19 ULN9.4
NetMCP5_20: MCP5.20 ULN9.3
NetMCP5_21: MCP5.21 ULN9.2
NetMCP5_22: MCP5.22 ULN9.1
NetMCP5_23: MCP5.23 ULN9.20
NetMCP5_24: MCP5.24 ULN9.19
NetMCP5_25: MCP5.25 ULN10.6
NetMCP5_26: MCP5.26 ULN10.5
NetMCP5_27: MCP5.27 ULN10.4
NetMCP5_28: MCP5.28 ULN10.3
NetMCP6_1: MCP6.1 ULN12.2
NetMCP6_2: MCP6.2 ULN12.1
NetMCP6_3: MCP6.3 ULN12.20
NetMCP6_4: MCP6.4 ULN12.19
NetMCP6_17: MCP6.17 ULN11.6
NetMCP6_18: MCP6.18 ULN11.5
NetMCP6_19: MCP6.19 ULN11.4
NetMCP6_20: MCP6.20 ULN11.3
NetMCP6_21: MCP6.21 ULN11.2
NetMCP6_22: MCP6.22 ULN11.1
NetMCP6_23: MCP6.23 ULN11.20
NetMCP6_24: MCP6.24 ULN11.19
NetMCP6_25: MCP6.25 ULN12.6
NetMCP6_26: MCP6.26 ULN12.5
NetMCP6_27: MCP6.27 ULN12.4
NetMCP6_28: MCP6.28 ULN12.3
NetR30_2: R30.2 U2.12
NetR31_2: R31.2 U2.13
NetR32_2: R32.2 U2.15
NetR33_2: R33.2 U2.6
R\E\S\E\T\: P9.10 P10.10 R35.2 U2.25
RGND: C12.2 C13.2 C16.2 C17.2 C20.2 C21.2 C24.2 C25.2 C28.2 C34.2 J5.1 ULN3.8 ULN3.21 ULN4.8 ULN4.21 ULN5.8 ULN5.21 ULN6.8 ULN6.21 ULN7.8 ULN7.21 ULN8.8 ULN8.21 ULN9.8 ULN9.21 ULN10.8 ULN10.21 ULN11.8 ULN11.21 ULN12.8 ULN12.21 | length 23.6
  Top Layer w0.2: C12.2@47.639,35.293 47.639,35.345 47.755,35.462 47.755,35.534 47.8,35.579 ULN3.21@47.8,38.1 ; C13.2@47.639,47.993 47.639,48.029 47.825,48.216 47.825,48.984 ULN4.21@47.825,50.809 ; C16.2@47.639,60.693 47.639,60.729 47.825,60.916 ULN5.8@47.825,61.684 ULN5.21@47.825,63.509 ; C17.2@47.639,73.393 47.639,73.429 47.825,73.616 ULN6.8@47.825,74.384 ULN6.21@47.825,76.209 ; C20.2@47.639,86.093 47.639,86.129 47.825,86.316 ULN7.8@47.825,87.084 ULN7.21@47.825,88.909
  Bottom Layer w0.2: ULN11.21@47.786,43.5 ULN11.8@47.786,45.325 ; ULN12.21@47.8,30.8 ULN12.8@47.8,32.625 ; ULN10.21@47.8,56.2 ULN10.8@47.8,58.023 ; ULN9.21@47.8,68.9 ULN9.8@47.8,70.725 ; ULN8.21@47.804,81.632 ULN8.8@47.804,83.457
  other v2: 47.225,30.25 48.325,30.25 47.225,31.35 48.325,31.35 47.25,37.55 48.35,37.55 47.25,38.65 48.35,38.65 47.25,42.956 48.35,42.956 47.25,44.056 48.35,44.056 47.298,50.234 48.398,50.234 47.298,51.334 48.398,51.334 47.25,55.648 48.35,55.648 47.25,56.748 48.35,56.748 47.275,62.959 48.375,62.959 47.275,64.059 48.375,64.059 47.275,68.35 48.375,68.35 47.275,69.45 48.375,69.45 47.275,75.659 48.375,75.659 47.275,76.759 48.375,76.759 47.275,81.088 48.375,81.088 47.275,82.188 48.375,82.188 47.275,88.359 48.375,88.359 47.275,89.459 48.375,89.459
S\S\: P9.8 P10.8 R30.1
SCK: P9.6 P10.6 R32.1
SCL: MCP2.8 MCP3.8 MCP4.8 MCP5.8 MCP6.8 R38.2 U2.24
SDA: MCP2.9 MCP3.9 MCP4.9 MCP5.9 MCP6.9 R37.2 U2.23
pads on no net: K1_U_rel_ladder1.2 K1_U_rel_ladder1.5 K1_U_rel_ladder2.2 K1_U_rel_ladder2.5 K1_U_rel_ladder3.2 K1_U_rel_ladder3.5 K1_U_rel_ladder4.2 K1_U_rel_ladder4.5 K1_U_rel_ladder5.2 K1_U_rel_ladder5.5 K1_U_rel_ladder6.2 K1_U_rel_ladder6.5 K1_U_rel_ladder7.2 K1_U_rel_ladder7.5 K1_U_rel_ladder8.2 K1_U_rel_ladder8.5 K1_U_rel_ladder9.2 K1_U_rel_ladder9.5 K1_U_rel_ladder10.2 K1_U_rel_ladder10.5 K2_U_rel_ladder1.2 K2_U_rel_ladder1.5 K2_U_rel_ladder2.2 K2_U_rel_ladder2.5 K2_U_rel_ladder3.2 K2_U_rel_ladder3.5 K2_U_rel_ladder4.2 K2_U_rel_ladder4.5 K2_U_rel_ladder5.2 K2_U_rel_ladder5.5 K2_U_rel_ladder6.2 K2_U_rel_ladder6.5 K2_U_rel_ladder7.2 K2_U_rel_ladder7.5 K2_U_rel_ladder8.2 K2_U_rel_ladder8.5 K2_U_rel_ladder9.2 K2_U_rel_ladder9.5 K2_U_rel_ladder10.2 K2_U_rel_ladder10.5 K3_U_rel_ladder1.2 K3_U_rel_ladder1.5 K3_U_rel_ladder2.2 K3_U_rel_ladder2.5 K3_U_rel_ladder3.2 K3_U_rel_ladder3.5 K3_U_rel_ladder4.2 K3_U_rel_ladder4.5 K3_U_rel_ladder5.2 K3_U_rel_ladder5.5 K3_U_rel_ladder6.2 K3_U_rel_ladder6.5 K3_U_rel_ladder7.2 K3_U_rel_ladder7.5 K3_U_rel_ladder8.2 K3_U_rel_ladder8.5 K3_U_rel_ladder9.2 K3_U_rel_ladder9.5 K3_U_rel_ladder10.2 K3_U_rel_ladder10.5 K4_U_rel_ladder1.2 K4_U_rel_ladder1.5 K4_U_rel_ladder2.2 K4_U_rel_ladder2.5 K4_U_rel_ladder3.2 K4_U_rel_ladder3.5 K4_U_rel_ladder4.2 K4_U_rel_ladder4.5 K4_U_rel_ladder5.2 K4_U_rel_ladder5.5 K4_U_rel_ladder6.2 K4_U_rel_ladder6.5 K4_U_rel_ladder7.2 K4_U_rel_ladder7.5 K4_U_rel_ladder8.2 K4_U_rel_ladder8.5 K4_U_rel_ladder9.2 K4_U_rel_ladder9.5 K4_U_rel_ladder10.2 K4_U_rel_ladder10.5 K5_U_rel_ladder1.2 K5_U_rel_ladder1.5 K5_U_rel_ladder2.2 K5_U_rel_ladder2.5 K5_U_rel_ladder3.2 K5_U_rel_ladder3.5 K5_U_rel_ladder4.2 K5_U_rel_ladder4.5 K5_U_rel_ladder5.2 K5_U_rel_ladder5.5 K5_U_rel_ladder6.2 K5_U_rel_ladder6.5 K5_U_rel_ladder7.2 K5_U_rel_ladder7.5 K5_U_rel_ladder8.2 K5_U_rel_ladder8.5 K5_U_rel_ladder9.2 K5_U_rel_ladder9.5 K5_U_rel_ladder10.2 K5_U_rel_ladder10.5 K6_U_rel_ladder1.2 K6_U_rel_ladder1.5 K6_U_rel_ladder2.2 K6_U_rel_ladder2.5 K6_U_rel_ladder3.2 K6_U_rel_ladder3.5 K6_U_rel_ladder4.2 K6_U_rel_ladder4.5 K6_U_rel_ladder5.2 K6_U_rel_ladder5.5 K6_U_rel_ladder6.2 K6_U_rel_ladder6.5 K6_U_rel_ladder7.2 K6_U_rel_ladder7.5 K6_U_rel_ladder8.2 K6_U_rel_ladder8.5 K6_U_rel_ladder9.2 K6_U_rel_ladder9.5 K6_U_rel_ladder10.2 K6_U_rel_ladder10.5 K7_U_rel_ladder1.2 K7_U_rel_ladder1.5 K7_U_rel_ladder2.2 K7_U_rel_ladder2.5 K7_U_rel_ladder3.2 K7_U_rel_ladder3.5 K7_U_rel_ladder4.2 K7_U_rel_ladder4.5 K7_U_rel_ladder5.2 K7_U_rel_ladder5.5 K7_U_rel_ladder6.2 K7_U_rel_ladder6.5 K7_U_rel_ladder7.2 K7_U_rel_ladder7.5 K7_U_rel_ladder8.2 K7_U_rel_ladder8.5 K7_U_rel_ladder9.2 K7_U_rel_ladder9.5 K7_U_rel_ladder10.2 K7_U_rel_ladder10.5 K8_U_rel_ladder1.2 K8_U_rel_ladder1.5 K8_U_rel_ladder2.2 K8_U_rel_ladder2.5 K8_U_rel_ladder3.2 K8_U_rel_ladder3.5 K8_U_rel_ladder4.2 K8_U_rel_ladder4.5 K8_U_rel_ladder5.2 K8_U_rel_ladder5.5 K8_U_rel_ladder6.2 K8_U_rel_ladder6.5 K8_U_rel_ladder7.2 K8_U_rel_ladder7.5 K8_U_rel_ladder8.2 K8_U_rel_ladder8.5 K8_U_rel_ladder9.2 K8_U_rel_ladder9.5 K8_U_rel_ladder10.2 K8_U_rel_ladder10.5 LD2.4 MCP2.7 MCP2.10 MCP2.15 MCP2.16 MCP2.29 MCP3.7 MCP3.10 MCP3.15 MCP3.16 MCP3.29 MCP4.7 MCP4.10 MCP4.15 MCP4.16 MCP4.29 MCP5.7 MCP5.10 MCP5.15 MCP5.16 MCP5.29 MCP6.7 MCP6.10 MCP6.15 MCP6.16 MCP6.29 U2.1 U2.2 U2.5 U2.7 U2.8 U2.9 U2.10 U2.11 U2.17 U2.19 U2.20 U2.21 U2.22 U2.26 U2.27 U2.28 ULN3.7 ULN3.18 ULN4.7 ULN4.18 ULN5.7 ULN5.18 ULN6.7 ULN6.18 ULN7.7 ULN7.18 ULN8.7 ULN8.18 ULN9.7 ULN9.18 ULN10.7 ULN10.18 ULN11.7 ULN11.18 ULN12.7 ULN12.18
copper on no net:
  other v2: 38.4,33.393 39.5,33.393 40.6,33.393 38.4,34.493 39.5,34.493 40.6,34.493 38.4,35.593 39.5,35.593 40.6,35.593 38.4,45.393 39.5,45.393 40.6,45.393 38.4,46.493 39.5,46.493 40.6,46.493 38.4,47.593 39.5,47.593 40.6,47.593 38.4,58.793 39.5,58.793 40.6,58.793 38.4,59.893 39.5,59.893 40.6,59.893 38.4,60.993 39.5,60.993 40.6,60.993 38.4,70.793 39.5,70.793 40.6,70.793 38.4,71.893 39.5,71.893 40.6,71.893 38.4,72.993 39.5,72.993 40.6,72.993 38.4,83.493 39.5,83.493 40.6,83.493 38.4,84.593 39.5,84.593 40.6,84.593 38.4,85.693 39.5,85.693 40.6,85.693

## Polygon pours and split planes (outlines as drawn)
AGND on Top Layer "NONET_L-01_P-001" (solid, remove dead copper, shelved, pour order 0): 147.5,25.9 51.432,25.9 51.432,99.1 147.5,99.1

## Text inside footprints (layer, text, board x,y; h text height)
P5: Top Overlay "20" at 143.608,88.384 h1.27 r90; Top Overlay "19" at 146.148,88.384 h1.27 r90; Top Overlay "1" at 146.148,61.46 h1.27 r90; Top Overlay "2" at 143.608,61.46 h1.27 r90
P6: Top Overlay "20" at 143.608,55.924 h1.27 r90; Top Overlay "19" at 146.148,55.924 h1.27 r90; Top Overlay "1" at 146.148,29 h1.27 r90; Top Overlay "2" at 143.608,29 h1.27 r90